# EAGLE board infinity_mirror_reve (EAGLE 9.6.2)
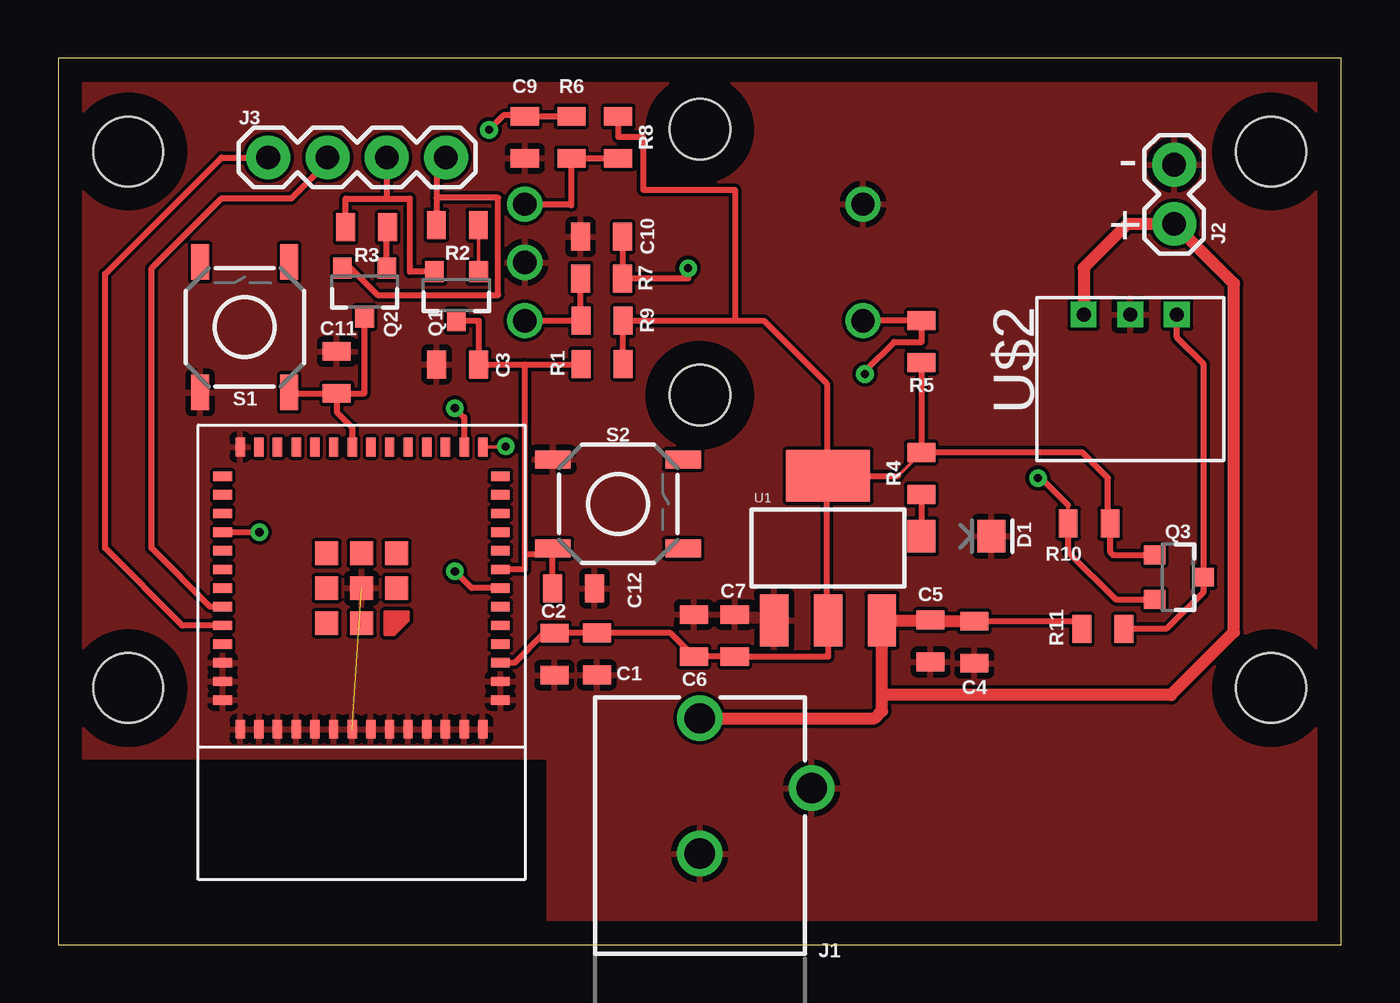
[diagram p0: board, top side]
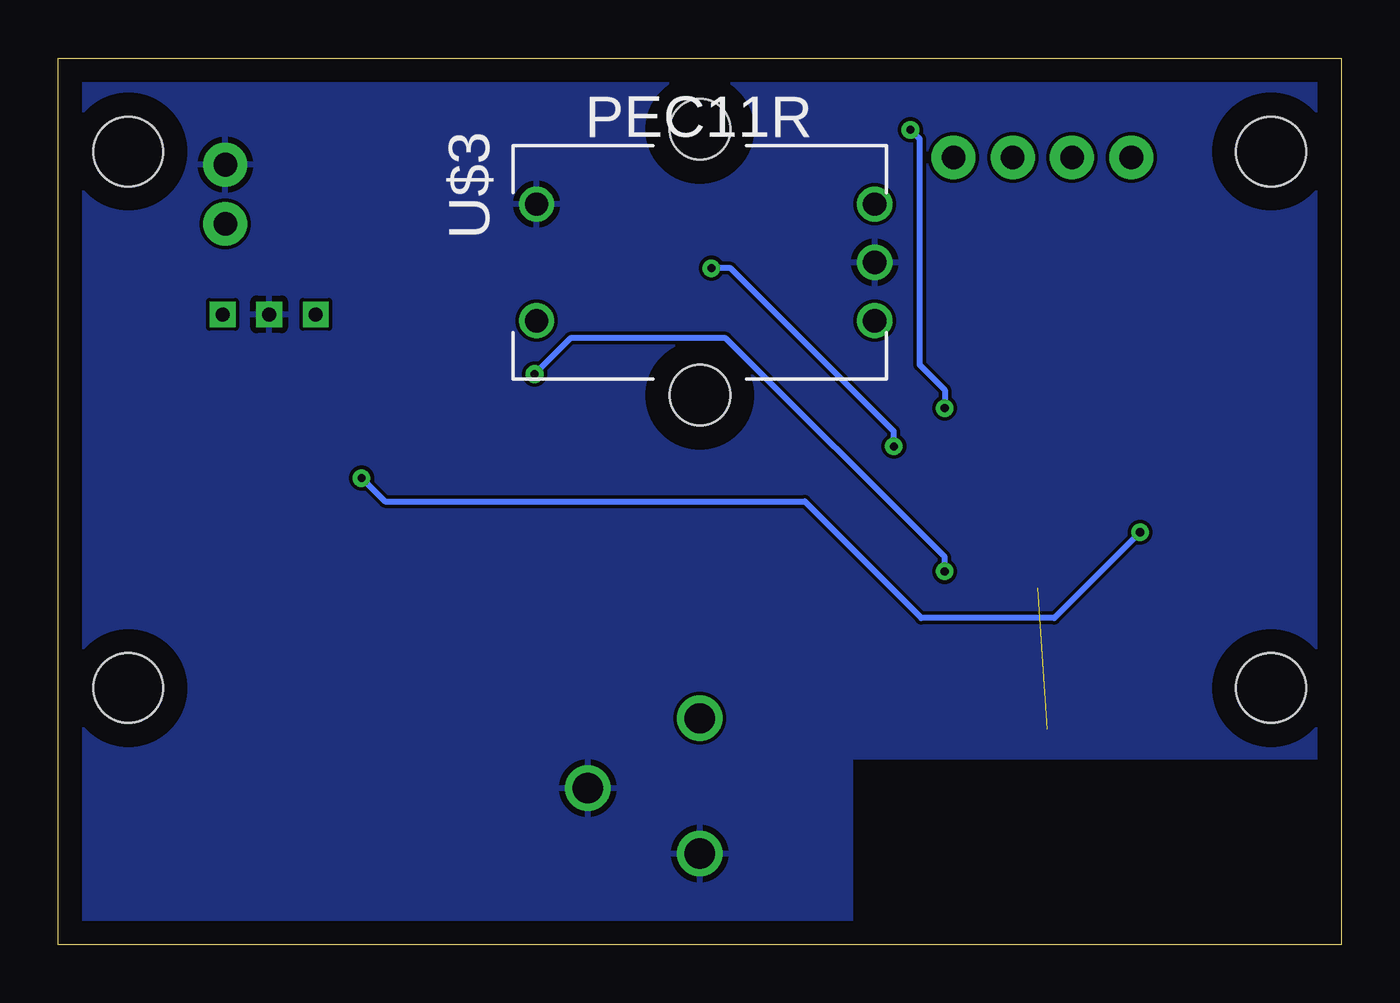
[diagram p1: board, bottom side, seen from below]

Size 55 x 38 mm. Coordinates in mm from the lower left corner, seen from the top.
Outline: 0,0 55,0 55,38 0,38 0,0
Copper layers (1*16): Top 0.035mm / dielectric 1.5mm / Bottom 0.035mm
Design rules "default": minimum track width 6mil, minimum drill 0.35mm, track to track 6mil, track to pad 6mil, pad to pad 6mil, via to via 6mil, smd to smd 6mil, copper to edge 40mil, drill to drill 6mil, minimum pad ring 10mil, minimum via ring 8mil, stop-mask expansion 4mil, vias tented up to drill 0mil, thermal gap 10mil
Holes 3 mm at 3,34 52,34 52,11 3,11
tKeepout: area 0.5,31.5 to 5.5,36.5; area 0.5,8.5 to 5.5,13.5; area 49.5,8.5 to 54.5,13.5; area 49.5,31.5 to 54.5,36.5

## Footprints (pad centres in the part's own frame; a part is rotated, then mirrored left to right if it is on the bottom)
0805 = smd 0.8 x 1.2: 1 -0.9,0; 2 0.9,0
LED-1206 = smd 1.2 x 1.4: A -1.5,0; C 1.5,0
POWER_JACK_PTH_BREAD = drill 1.3: GND 0,7.9; GNDBREAK 4.8,10.7; PWR 0,13.7
1X02 = drill 1.016 pad 1.88: 1 0,0; 2 2.54,0
1X04 = drill 1.016 pad 1.88: 1 0,0; 2 2.54,0; 3 5.08,0; 4 7.62,0
SOT23-3 = smd 0.8 x 0.9: 1 -0.95,-1; 2 0.95,-1; 3 0,1.1
TACTILE_SWITCH_SMD_5.2MM = smd 1.524 x 0.762: 1 -2.794,1.905; 2 2.794,1.905; 3 -2.794,-1.905; 4 2.794,-1.905
SOT223 = smd 1.219 x 2.235: 1 -2.311,-3.099; 2 0,-3.099; 3 2.311,-3.099 | smd 3.6 x 2.2: 4 0,3.099
ESP32-MINI-1-N4 = smd 0.8 x 0.4: 1 -5.95,4.8; 2 -5.95,4; 3 -5.95,3.2; 4 -5.95,2.4; 5 -5.95,1.6; 6 -5.95,0.8; 7 -5.95,0; 8 -5.95,-0.8; 9 -5.95,-1.6; 10 -5.95,-2.4; 11 -5.95,-3.2; 12 -5.95,-4; 13 -5.95,-4.8; 28 5.95,-4.8; 29 5.95,-4; 30 5.95,-3.2; 31 5.95,-2.4; 32 5.95,-1.6; 33 5.95,-0.8; 34 5.95,0; 35 5.95,0.8; 36 5.95,1.6; 37 5.95,2.4; 38 5.95,3.2; 39 5.95,4; 40 5.95,4.8 | smd 0.4 x 0.8: 14 -5.2,-6.05; 15 -4.4,-6.05; 16 -3.6,-6.05; 17 -2.8,-6.05; 18 -2,-6.05; 19 -1.2,-6.05; 20 -0.4,-6.05; 21 0.4,-6.05; 22 1.2,-6.05; 23 2,-6.05; 24 2.8,-6.05; 25 3.6,-6.05; 26 4.4,-6.05; 27 5.2,-6.05; 41 5.2,6.05; 42 4.4,6.05; 43 3.6,6.05; 44 2.8,6.05; 45 2,6.05; 46 1.2,6.05; 47 0.4,6.05; 48 -0.4,6.05; 49 -1.2,6.05; 50 -2,6.05; 51 -2.8,6.05; 52 -3.6,6.05; 53 -4.4,6.05; 54 -5.2,6.05 | smd 1 x 1: 55 0,0; P$56 -1.5,0; P$57 1.5,0; P$58 1.5,-1.5; P$59 0,-1.5; P$60 -1.5,-1.5; P$61 1.5,1.5; P$62 0,1.5
3-PIN-JST = drill 0.6 square: P$1 -2,0; P$2 0,0; P$3 2,0
PEC11R-4320F-S0012 = drill 1: A -2.5,-7.5; B 2.5,-7.5; C 0,-7.5; GND 2.5,7; VCC -2.5,7 | hole 2.6: -5.7,0; 5.7,0

## Placement (x,y rotation side)
C1  10uF  [0805]  23.09,12.46 270 top
C2  0.1uF  [0805]  21.27,12.45 270 top
C3  1uF  [0805]  17.12,24.87 180 top
C4  10uF  [0805]  39.27,12.96 270 top
C5  0.1uF  [0805]  37.39,13.02 270 top
C6  0.1uF  [0805]  27.25,13.25 90 top
C7  10uF  [0805]  29,13.25 90 top
C9  0.1uF  [0805]  20,34.61 270 top
C10  0.1uF  [0805]  23.29,30.35 180 top
C11  0.1uF  [0805]  11.94,24.53 270 top
C12  0.1uF  [0805]  22.09,15.27 180 top
D1  RED  [LED-1206]  38.51,17.51 0 top
J1  POWER_JACKPTH_BREAD  [POWER_JACK_PTH_BREAD]  27.5,-4 0 top
J2  LED_CAP  [1X02]  47.84,30.9 90 top
J3  SERIAL  [1X04]  9,33.75 0 top
Q1  800mA/40V  [SOT23-3]  17.07,27.85 180 top
Q2  800mA/40V  [SOT23-3]  13.13,28 180 top
Q3  BSS138  [SOT23-3]  48,15.75 270 top
R1  10k  [0805]  23.31,24.9 0 top
R2  10k  [0805]  17.11,30.85 180 top
R3  10k  [0805]  13.22,30.76 180 top
R4  5.1K  [0805]  37,20.2 90 top
R5  10k  [0805]  37.01,25.85 270 top
R6  10k  [0805]  22,34.61 270 top
R7  10k  [0805]  23.29,28.56 0 top
R8  10k  [0805]  24,34.61 270 top
R9  10k  [0805]  23.31,26.75 180 top
R10  10k  [0805]  44.19,18.06 0 top
R11  10k  [0805]  44.78,13.53 180 top
S1  SWITCH  [TACTILE_SWITCH_SMD_5.2MM]  7.99,26.47 90 top
S2  SWITCH  [TACTILE_SWITCH_SMD_5.2MM]  24,18.89 0 top
U1  3.3LDO  [SOT223]  33,17 0 top
U$1  ESP32-MINI-1-N4  [ESP32-MINI-1-N4]  13,15.28 180 top
U$2  3-PIN-JST  [3-PIN-JST]  45.96,27.02 0 top
U$3  PEC11R  [PEC11R-4320F-S0012]  27.5,29.25 90 bottom

## Library data of the parts
C1-C7 C9-C12 R1-R11 = _111_IH
D1 = SparkFun-LED; PROD_ID: DIO-09912
J1 = SparkFun-Connectors; PROD_ID: PRT-10811
J2 = SparkFun-Connectors
J3 = SparkFun-Connectors; PROD_ID: CONN-09696
Q1 Q2 = SparkFun-DiscreteSemi; PROD_ID: TRANS-08049
Q3 = SparkFun-DiscreteSemi; PROD_ID: TRANS-00830
S1 S2 = SparkFun-Switches; PROD_ID: SWCH-14139
U1 = SparkFun-IC-Power; PROD_ID: VREG-08170
U$1-U$3 = infinity_mirror_revd

## Nets
BUTTON: R5.1 U$1.7 U$3.VCC
DTR: J3.4 Q2.2 R2.2
ENC_A: C10.1 R7.2 U$1.14
ENC_B: C9.1 R6.1 U$1.15
ESP_RST: C3.1 C12.2 Q1.3 R1.1 S2.3 U$1.8
GND: C1.2 C2.2 C3.2 C4.2 C5.2 C6.2 C7.2 C9.2 C10.2 C11.1 C12.1 D1.C J1.GND J1.GNDBREAK J2.2 S1.1 S2.1 U1.1 U$1.1 U$1.2 U$1.27 U$1.38 U$1.39 U$1.40 U$1.41 U$1.42 U$1.43 U$1.44 U$1.45 U$1.46 U$1.47 U$1.48 U$1.49 U$1.50 U$1.51 U$1.52 U$1.53 U$1.54 U$1.55 U$2.P$2 U$3.C U$3.GND
GPIO0: C11.2 Q2.3 S1.3 U$1.21
IO23: Q3.2 R10.1 U$1.31
LED+: D1.A R4.1
LED_DATA: Q3.3 R11.1 U$2.P$3
N$2: R6.2 R8.2 U$3.B
N$3: R7.1 R9.2 U$3.A
Q1_BASE: Q1.1 R2.1
Q2_BASE: Q2.1 R3.1
RTS: J3.3 Q1.2 R3.2
U0RXD: J3.2 U$1.35
U0TXD: J3.1 U$1.36
VCC_1: C4.1 C5.1 J1.PWR J2.1 R11.2 U1.3 U$2.P$1
VCC_2: C1.1 C2.1 C6.1 C7.1 Q3.1 R1.2 R4.2 R5.2 R8.1 R9.1 R10.2 U1.2 U1.4 U$1.3

## Tracks (layer width: path | path; a pad name or v marks a point on that pad's centre or on a via)
BUTTON  (via drill 0.35)
  Top 0.254: U$1.7 17.72,15.28 v17,16 | U$3.VCC R5.1 37.02,25.84 35.84,25.84 34.58,24.58 v34.58,24.46
  Bottom 0.254: v17,16 17,16.61 26.39,26 33.04,26 v34.58,24.46
DTR
  Top 0.152: Q2.2 12.53,29
  Top 0.254: 12.53,29 13.68,27.85 18.86,27.85 18.86,32.02 16.21,32.02 R2.2 16.21,33.34 J3.4
ENC_A  (via drill 0.35)
  Top 0.152: U$1.14 19.15,21.33 v19.18,21.36
  Top 0.254: C10.1 R7.2 27,28.56 v27,29
  Bottom 0.254: v19.18,21.36 19.18,22 26.18,29 v27,29
ENC_B  (via drill 0.35)
  Top 0.254: R6.1 C9.1 19.95,35.56 19.09,35.56 v18.47,34.94 | v17,23 17.4,22.6 U$1.15
  Bottom 0.254: v17,23 17,23.78 18.07,24.85 18.07,34.54 v18.47,34.94
ESP_RST
  Top 0.152: 21.19,16.97 S2.3 20.94,16.72
  Top 0.254: C12.2 21.19,16.97 | 20.94,16.72 20,16.72 | U$1.8 20,16.08 20,16.72 | Q1.3 18.02,26.75 C3.1 20,24.87 | R1.1 22.41,24.87 20,24.87 | 20,16.72 20,24.87
GND  (1 unrouted)
  pour Top: 0,38 55,38 55,0 21,0 21,8 0,8
  pour Bottom: 0,38 0,8 21,8 21,0 55,0 55,38
GPIO0
  Top 0.152: S1.3 9.94,23.63
  Top 0.254: 9.94,23.63 C11.2 | C11.2 13.13,23.63 Q2.3 | C11.2 11.94,22.83 12.6,22.17 U$1.21
IO23  (via drill 0.35)
  Top 0.152: v42,20 42.13,20 | 43.29,18.84 R10.1
  Top 0.254: U$1.31 v8.62,17.68 | R10.1 43.29,16.84 45.33,14.8 Q3.2 | 43.29,18.84 42.13,20
  Bottom 0.254: v8.62,17.68 12.3,14 18,14 23,19 41,19 v42,20
LED+
  Top 0.152: R4.1
  Top 0.254: R4.1 D1.A
LED_DATA
  Top 0.254: U$2.P$3 47.96,26.02 49.1,24.88 Q3.3 49.1,15.12 47.53,13.56 45.68,13.56 R11.1
N$2
  Top 0.254: R8.2 R6.2 22,31.7 21.95,31.75 U$3.B
N$3
  Top 0.254: R7.1 22.39,26.77 R9.2 U$3.A
Q1_BASE
  Top 0.152: Q1.1 R2.1
Q2_BASE
  Top 0.254: Q2.1 14.08,30.72 R3.1
RTS
  Top 0.254: Q1.2 15.07,28.85 15.07,31.99 14,31.99 | R3.2 12.32,31.99 14,31.99 | J3.3 14.08,32.07 14,31.99
U0RXD
  Top 0.152: 11.54,33.54 J3.2
  Top 0.254: U$1.35 6.52,14.48 4,17 4,29 7,32 10,32 11.54,33.54
U0TXD
  Top 0.254: U$1.36 5.32,13.68 2,17 2,28.75 7,33.75 J3.1
VCC_1
  Top 0.254: R11.2 43.55,13.86 C4.1
  Top 0.508: C4.1 37.45,13.86 C5.1 37.37,13.9 U1.3 35.31,10.7 | U$2.P$1 43.96,29.02 45.84,30.9 J2.1 50.4,28.34 50.4,13.4 47.7,10.7 35.31,10.7 | J1.PWR 35,9.7 35.31,10.01 35.31,10.7
VCC_2
  Top 0.152: 36,20.1 R4.2
  Top 0.254: U$1.3 19.55,12.08 20.82,13.35 C2.1 C1.1 26.24,13.36 C6.1 C7.1 33,12.35 U1.2 32.95,13.95 32.95,20.05 | 36,20.1 U1.4 32.95,20.05 | R5.2 R4.2 43.9,21.1 45,20 45,18.15 R10.2 45.09,16.84 45.23,16.7 Q3.1 | R1.2 R9.1 29,26.75 | 29,26.75 30.25,26.75 32.95,24.05 32.95,20.05 | R8.1 24,34.63 25.07,34.63 25.07,32.36 29,32.36 29,26.75

## Text on the board
tPlace: - | +